# EAGLE board rocketpanda_v1 (EAGLE 9.0.1)
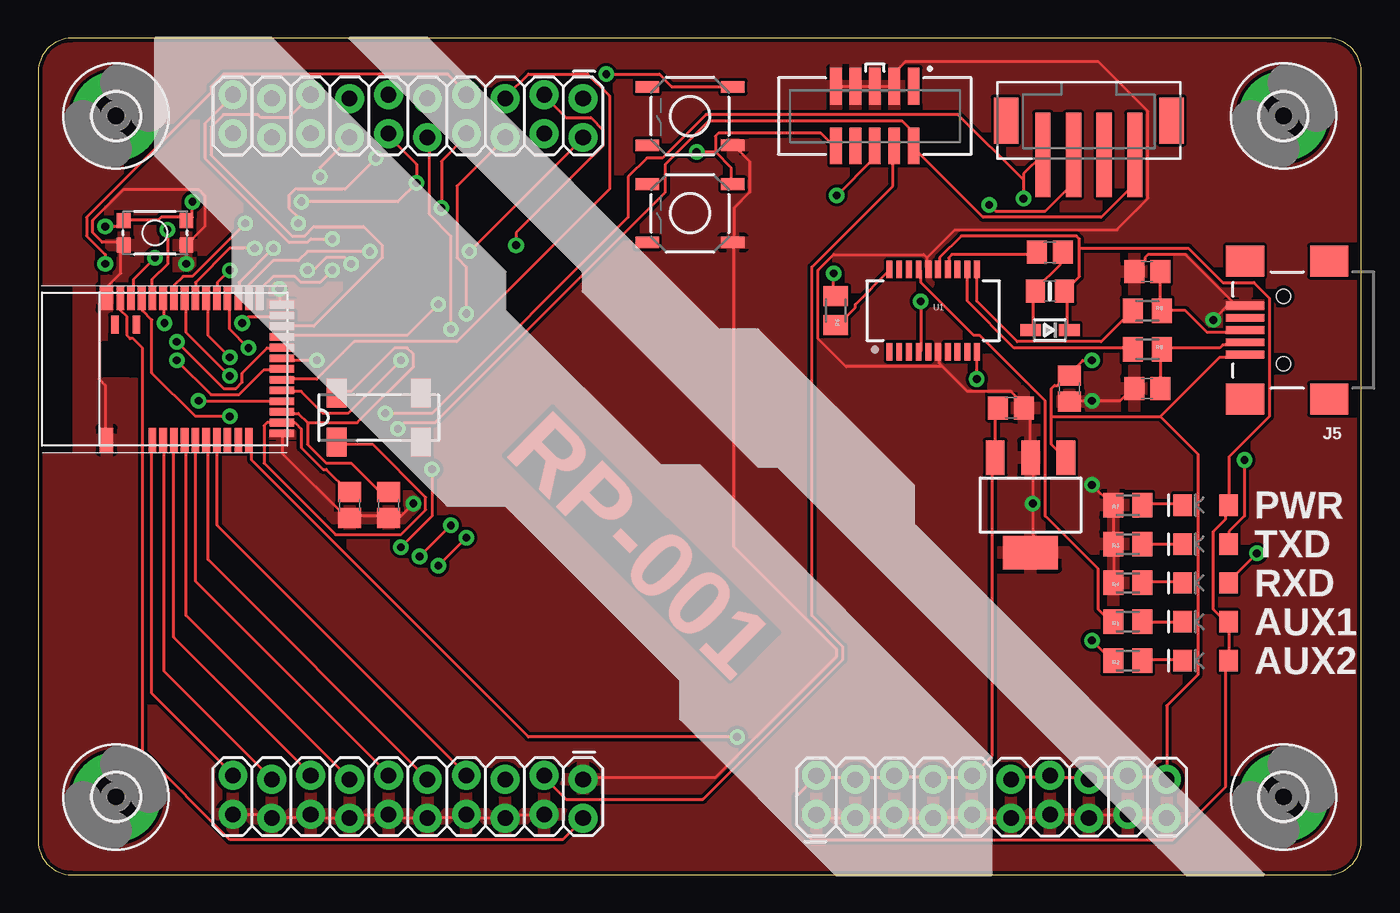
[diagram p0: board, top side]
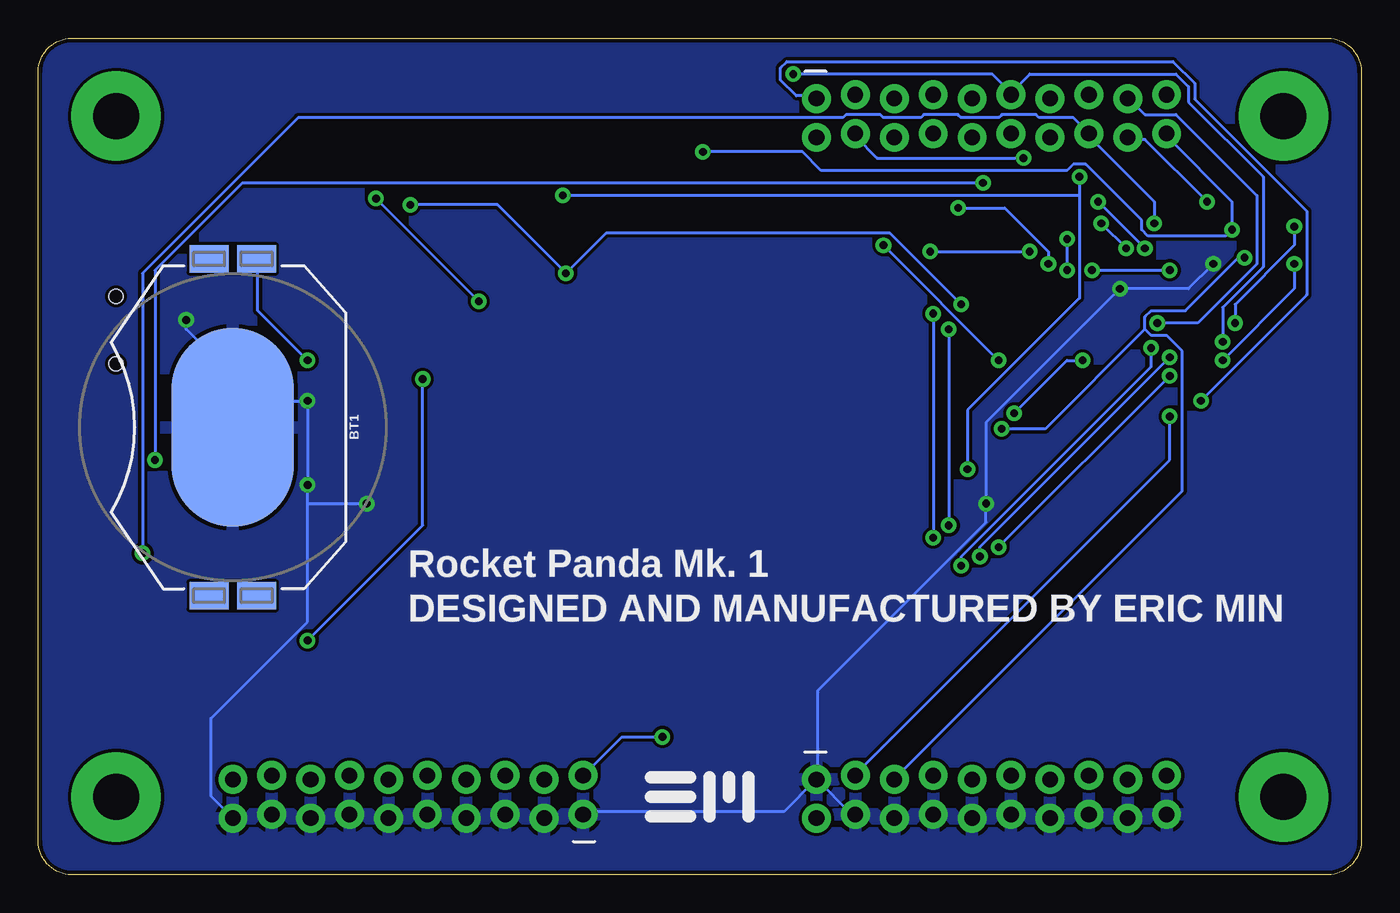
[diagram p1: board, bottom side, seen from below]

Size 86.36 x 54.61 mm. Coordinates in mm from the lower left corner, seen from the top.
Outline: 0,52.44 0,2.17 arc90 2.17,0 84.19,0 arc90 86.36,2.17 86.36,52.44 arc90 84.19,54.61 2.17,54.61 arc90 0,52.44
Copper layers (1*16): Top 0.035mm / dielectric 1.5mm / Bottom 0.035mm
Design rules "SparkFun": minimum track width 8mil, minimum drill 20mil, track to track 8mil, track to pad 8mil, pad to pad 8mil, via to via 8mil, smd to smd 8mil, copper to edge 10mil, drill to drill 8mil, minimum pad ring 12mil, minimum via ring 10mil, stop-mask expansion 4mil, vias tented up to drill 25mil, thermal gap 10mil
tKeepout: area 0,8.9 to 3.2,45.7
bKeepout: area 0,8.9 to 3.2,45.7

## Footprints (pad centres in the part's own frame; a part is rotated, then mirrored left to right if it is on the bottom)
BATTCON_20MM_4LEGS_OVERPASTE_INNER = smd 1.778 x 2.54: 1 -11,1.55; 3 11,1.55; P$1 -11,-1.55; P$2 11,-1.55 | smd 13 x 8: 2 0,0
C0805 = smd 1.3 x 1.5: 1 -0.85,0; 2 0.85,0
SOD-323 = smd 1.35 x 0.8: A 1.27,0; C -1.27,0
LED-1206@1 = smd 1.2 x 1.4: A -1.5,0; C 1.5,0
3,0-PAD = drill 3 pad 5.842: B3,0 0,0
SOT223 = smd 1.219 x 2.235: 1 -2.311,-3.099; 2 0,-3.099; 3 2.311,-3.099 | smd 3.6 x 2.2: 4 0,3.099
2X10_LOCK = drill 1.016 pad 1.88: 1 0,0.127; 2 0,2.667; 3 2.54,-0.127; 4 2.54,2.413; 5 5.08,0.127; 6 5.08,2.667; 7 7.62,-0.127; 8 7.62,2.413; 9 10.16,0.127; 10 10.16,2.667; 11 12.7,-0.127; 12 12.7,2.413; 13 15.24,0.127; 14 15.24,2.667; 15 17.78,-0.127; 16 17.78,2.413; 17 20.32,0.127; 18 20.32,2.667; 19 22.86,-0.127; 20 22.86,2.413
2X5-SMD-1.27MM = smd 0.76 x 2.4: 1 2.54,1.95; 2 2.54,-1.95; 3 1.27,1.95; 4 1.27,-1.95; 5 0,1.95; 6 0,-1.95; 7 -1.27,1.95; 8 -1.27,-1.95; 9 -2.54,1.95; 10 -2.54,-1.95
USB-MINIB = smd 2.5 x 0.5: D+ 2.5,0; D- 2.5,0.8; GND 2.5,-1.6; ID 2.5,-0.8; VBUS 2.5,1.6 | smd 2.5 x 2: S1 -3,4.5; S2 2.5,4.5; S3 -3,-4.5; S4 2.5,-4.5 | hole 0.9: 0,2.2; 0,-2.2
MC-306 = smd 1.3 x 1.9: 1 -2.75,-1.6; 2 2.75,-1.6; 3 2.75,1.6; 4 -2.75,1.6
M0805 = smd 1.3 x 1.6: 1 -0.95,0; 2 0.95,0
0805-NO = smd 1.24 x 1.5: 1 -0.95,0; 2 0.95,0
TACTILE_SWITCH_SMD_5.2MM = smd 1.524 x 0.762: 1 -2.794,1.905; 2 2.794,1.905; 3 -2.794,-1.905; 4 2.794,-1.905
TACTILE_SWITCH_SMD_4.6X2.8MM = smd 0.9 x 1: 1 -2.05,-0.8; 2 2.05,-0.8; 3 2.05,0.8; 4 -2.05,0.8
SSOP20_L = smd 0.381 x 1.143: 1 -2.857,-2.68; 2 -2.223,-2.68; 3 -1.587,-2.68; 4 -0.953,-2.68; 5 -0.318,-2.68; 6 0.318,-2.68; 7 0.953,-2.68; 8 1.587,-2.68; 9 2.223,-2.68; 10 2.857,-2.68; 11 2.857,2.68; 12 2.223,2.68; 13 1.587,2.68; 14 0.953,2.68; 15 0.318,2.68; 16 -0.318,2.68; 17 -0.953,2.68; 18 -1.587,2.68; 19 -2.223,2.68; 20 -2.857,2.68
MDBT40 = smd 1.6 x 0.9: P1 -4.65,3.8; P39 4.65,3.8 | smd 1.6 x 0.5: P2 -4.65,0.8; P3 -4.65,0.1; P4 -4.65,-0.6; P5 -4.65,-1.3; P6 -4.65,-2; P7 -4.65,-2.7; P8 -4.65,-3.4; P9 -4.65,-4.1; P10 -4.65,-4.8; P11 -4.65,-5.5; P25 4.65,-6.2; P26 4.65,-5.5; P27 4.65,-4.8; P28 4.65,-4.1; P29 4.65,-3.4; P30 4.65,-2.7; P31 4.65,-2; P32 4.65,-1.3; P33 4.65,-0.6; P34 4.65,0.1; P35 4.65,0.8; P36 4.65,1.5; P37 4.65,2.2; P38 4.65,2.9 | smd 0.5 x 1.6: P12 -4.2,-7.65; P13 -3.5,-7.65; P14 -2.8,-7.65; P15 -2.1,-7.65; P16 -1.4,-7.65; P17 -0.7,-7.65; P18 0,-7.65; P19 0.7,-7.65; P20 1.4,-7.65; P21 2.1,-7.65; P22 2.8,-7.65; P23 3.5,-7.65; P24 4.2,-7.65 | smd 1.2 x 0.5: P40 2.9,3.25; P41 2.9,1.85
B4B-PH-SM4-TB = smd 1 x 5.5: 1 3,0; 2 1,0; 3 -1,0; 4 -3,0 | smd 1.6 x 3: M1 5.4,-2.25; M2 -5.4,-2.25

## Placement (x,y rotation side)
BT1  [BATTCON_20MM_4LEGS_OVERPASTE_INNER]  73.66,29.21 270 bottom
C1  [C0805]  20.32,24.13 90 top
C2  [C0805]  22.86,24.13 90 top
C3  [C0805]  72.39,31.75 180 top
C4  [C0805]  72.39,39.37 180 top
C5  [C0805]  67.31,31.75 270 top
C6  [C0805]  63.5,30.48 0 top
C7  [C0805]  66.04,40.64 0 top
D1  1N4148  [SOD-323]  66.04,35.56 180 top
D3  GREEN  [LED-1206@1]  76.2,21.59 180 top
D4  GREEN  [LED-1206@1]  76.2,19.05 180 top
D7  GREEN  [LED-1206@1]  76.2,24.13 180 top
H1  MOUNT-PAD-ROUND3.0  [3,0-PAD]  5.08,49.53 0 top
H2  MOUNT-PAD-ROUND3.0  [3,0-PAD]  81.28,49.53 0 top
H3  MOUNT-PAD-ROUND3.0  [3,0-PAD]  5.08,5.08 0 top
H4  MOUNT-PAD-ROUND3.0  [3,0-PAD]  81.28,5.08 0 top
IC4  [SOT223]  64.77,24.13 180 top
J1  [2X10_LOCK]  35.56,50.8 180 top
J2  JTAG  [2X5-SMD-1.27MM]  54.61,49.53 0 top
J3  [2X10_LOCK]  35.56,6.35 180 top
J5  [USB-MINIB]  81.28,35.56 180 top
J7  [2X10_LOCK]  50.8,3.81 0 top
Q1  MC-306  [MC-306]  22.22,29.84 0 top
R1  [M0805]  71.12,16.51 0 top
R2  [M0805]  71.12,13.97 0 top
R3  [M0805]  71.12,21.59 0 top
R4  [M0805]  71.12,19.05 0 top
R5  10K  [0805-NO]  66.04,38.1 0 top
R6  [M0805]  52.07,36.83 90 top
R7  [M0805]  71.12,24.13 0 top
R8  [M0805]  72.39,34.29 180 top
R9  [M0805]  72.39,36.83 180 top
RXLED  GREEN  [LED-1206@1]  76.2,16.51 180 top
S1  [TACTILE_SWITCH_SMD_5.2MM]  42.55,49.53 180 top
S2  [TACTILE_SWITCH_SMD_5.2MM]  42.55,43.18 180 top
S3  [TACTILE_SWITCH_SMD_4.6X2.8MM]  7.62,41.91 0 top
TXLED  GREEN  [LED-1206@1]  76.2,13.97 180 top
U1  FTS31XS-U  [SSOP20_L]  58.42,36.83 0 top
U$1  MDBT42Q  [MDBT40]  8.25,33.02 90 top
X1  [B4B-PH-SM4-TB]  68.58,46.99 180 top

## Library data of the parts
BT1 = SparkFun-Batteries
C1-C7 R1-R4 R6-R9 = adafruit
D1 R5 = microbuilder
D3 D4 D7 RXLED TXLED = SparkFun-LED; PROD_ID: DIO-09910
H1-H4 = holes
IC4 = linear-technology; MPN: LT1129CST-5#PBF; OC_FARNELL: 1663375; OC_NEWARK: 57M2069
J1 J3 J7 = SparkFun-Connectors
J2 = SparkFun-Connectors; PROD_ID: CONN-14503
J5 = SparkFun-Connectors; PROD_ID: CONN-08193; SF_ID: PRT-00587
Q1 = crystal; MPN: MC-306 60.0KHZ 100PPM ,12.5PF; OC_FARNELL: 1278040; OC_NEWARK: 31M5576
S1 S2 = SparkFun-Switches; PROD_ID: SWCH-08247; SF_SKU: COM-08720
S3 = SparkFun-Switches; PROD_ID: SWCH-13065
U1 = SparkFun-DigitalIC; PROD_ID: IC-11524
U$1 = mdbt42
X1 = con-JST PH

## Nets
3.3V: C6.1 D1.C D7.A IC4.3 J7.2 J7.4 J7.6 J7.8 J7.10 R5.2 RXLED.A TXLED.A U1.15 U$1.P11
3V3: J2.1
D+: C4.1 J5.D+ R9.1
D-: C3.1 J5.D- R8.1
DFU: J1.18 S3.3 S3.4 U$1.P34
DTR: C7.1 U1.14
FRST: J3.2 U$1.P38
GND: BT1.2 C1.1 C2.1 C3.2 C4.2 C5.2 C6.2 IC4.2 IC4.4 J2.3 J2.5 J2.7 J2.9 J3.1 J3.4 J3.6 J3.8 J3.10 J3.12 J3.14 J3.16 J3.18 J3.20 J5.GND J7.1 J7.3 J7.5 J7.7 J7.9 J7.11 J7.13 J7.15 J7.17 J7.19 R3.1 R4.1 R7.1 S1.1 S2.1 S3.1 S3.2 U1.6 U1.16 U$1.P1 U$1.P12 U$1.P24 U$1.P39
N$1: D3.C R3.2
N$2: D4.C R4.2
N$3: C2.2 Q1.4 U$1.P14
N$4: C1.2 Q1.1 U$1.P13
N$5: D7.C R7.2
N$6: R6.1 U1.20
N$40: R1.2 RXLED.C
N$41: R2.2 TXLED.C
N$42: R1.1 U1.17
N$50: R2.1 U1.10
N$51: R8.2 U1.12
N$52: R9.2 U1.11
NRST: J1.20 J2.10 S2.3 U$1.P35
P002: J1.1 U$1.P15
P003: J1.3 U$1.P16
P004: J1.5 U$1.P17
P005: J1.7 U$1.P18
P006: J1.9
P007: J1.11 S1.3 U$1.P20
P008: J1.13
P009: J1.15 U$1.P22
P010: J1.17 U$1.P23
P011: J1.19 U$1.P25
P012: J1.2 U$1.P26
P013: J1.4 U$1.P27
P014: J1.6 U$1.P28
P015: J1.8 U$1.P29
P016: J1.10 U$1.P30
P017: D3.A J1.12 U$1.P31
P018: J1.14 J2.6 U$1.P32
P019: D4.A J1.16 U$1.P33
P025: J3.19 U$1.P2
P026: J3.17 U$1.P3
P027: J3.15 U$1.P4
P028: J3.13 U$1.P5
P029: J3.11 U$1.P6
P030: J3.9 U$1.P7
P031: J3.7 U$1.P8
RESET: C7.2 D1.A R5.1
RX: R6.2 U$1.P21 X1.2
SWCLK: J2.4 J3.3 U$1.P36
SWDCLK: X1.3
SWDIO: J2.2 J3.5 U$1.P37 X1.4
TX: U1.4 U$1.P19 X1.1
VIN: BT1.1 C5.1 IC4.1 J5.VBUS J7.12 J7.14 J7.16 J7.18 J7.20

## Tracks (layer width: path | path; a pad name or v marks a point on that pad's centre or on a via)
3.3V  (via drill 0.51)
  Top 0.203: 67.97,40.89 67.97,39.07 67.16,38.25 R5.2 67.16,38.05 67.16,35.61 D1.C | 67.97,40.89 67.97,41.5 67.77,41.71 60.25,41.71 58.83,40.28 58.83,39.68 U1.15 | 67.97,40.89 75.08,40.89 77.32,38.66 79.35,38.66 80.37,37.64 80.37,29.92 77.72,27.28 77.72,24.23 D7.A 77.52,24.03 77.52,23.22 76.71,22.4 76.71,17.32 77.52,16.51 RXLED.A 77.72,16.51 77.72,14.07 TXLED.A 77.52,13.87 77.52,5.74 74.07,2.29 50.49,2.29 49.48,3.3 49.48,5.13 50.7,6.35 J7.2 50.9,6.35 53.34,6.35 | C6.1 62.48,30.33 62.48,27.28 IC4.3 62.28,27.08 62.28,7.77 61.06,6.55 J7.10 60.86,6.35 58.42,6.35 | 58.42,6.35 55.98,6.35 J7.6 55.78,6.35 53.34,6.35 | v45.62,8.99 32,8.99 13.92,27.08 13.92,28.3 U$1.P11 | 53.34,6.35 J7.4 | 58.42,6.35 J7.8
  Bottom 0.203: v45.62,8.99 48.26,8.99 50.7,6.55 J7.2
D+
  Top 0.203: C4.1 73.25,39.27 73.25,36.83 R9.1 74.88,36.83 76.3,35.41 78.74,35.41 J5.D+
D-
  Top 0.203: C3.1 73.25,31.75 73.25,34.19 R8.1 73.46,34.39 77.11,34.39 77.32,34.6 78.74,34.6 J5.D-
DFU  (via drill 0.51)
  Top 0.203: v8.23,36.02 8.23,37.64 U$1.P34 | v4.37,42.32 5.18,42.32 5.38,42.52 S3.4 5.59,42.72 7.82,42.72 8.03,42.93 9.45,42.93 9.65,42.72 S3.3 9.86,42.72 10.06,42.93 v10.06,43.94
  Bottom 0.203: v8.23,36.02 8.23,37.24 4.37,41.1 v4.37,42.32 | v10.06,43.94 14.12,48.01 15.14,48.01 J1.18
DTR
  Top 0.203: U1.14 59.44,39.68 59.44,40.28 59.64,40.49 65.13,40.49 C7.1
FRST
  Top 0.203: U$1.P38 5.38,37.64 5.38,36.83 5.79,36.42 5.79,35.2 5.99,35 6.2,35 6.81,34.39 6.81,7.98 12.5,2.29 34.24,2.29 35.46,3.5 J3.2
GND  (via drill 0.51)
  Top 0.203: 53.34,51.46 52.12,51.46 J2.9 | 53.34,51.46 54.56,51.46 J2.5 54.76,51.46 55.78,51.46 J2.3 55.98,51.66 55.98,52.48 56.59,53.09 69.19,53.09 72.44,49.84 72.44,44.15 70.41,42.11 59.84,42.11 58.01,40.28 | 53.34,51.46 J2.7 | 59.03,33.17 60.66,31.55 63.5,31.55 64.52,30.53 C6.2 64.52,30.33 64.72,30.12 64.72,27.28 IC4.2 64.92,27.08 v64.92,24.23 64.92,21.18 IC4.4 | 59.03,33.17 58.83,33.38 58.83,33.99 U1.6 | 58.01,40.28 58.01,39.68 U1.16 | 58.01,40.28 57.81,40.49 51.92,40.49 50.9,39.47 50.9,35 52.73,33.17 59.03,33.17 | 22.86,23.42 20.42,23.42 C1.1 20.22,23.22 15.95,27.48 15.95,28.7 U$1.P12 | U$1.P1 4.37,28.5 4.37,31.95 3.96,32.36 3.96,37.24 4.37,37.64 U$1.P39 4.57,37.85 4.57,38.46 5.38,39.27 5.38,41.1 S3.1 5.38,41.3 4.17,41.3 3.56,41.91 3.56,42.72 5.59,44.76 10.46,44.76 10.87,44.35 10.87,42.32 9.86,41.3 S3.2 9.65,41.1 v9.65,39.88 | v15.75,38.25 15.75,37.24 U$1.P24 | 22.86,23.42 23.67,23.42 v24.49,24.23 | 22.86,23.42 C2.1 | 77.93,37.44 78.13,37.24 78.74,37.24 J5.GND | 77.93,37.44 74.88,40.49 72.44,40.49 72.24,40.28 72.24,40.08 71.63,39.47 C4.2 | 70.21,21.59 70.21,19.15 R4.1 | 70.21,21.59 70.21,24.03 R7.1 70,24.23 v68.78,25.45 | 70.21,21.59 R3.1 | C5.2 67.36,30.94 v68.78,30.94 70.61,30.94 71.43,31.75 C3.2 | v76.71,36.22 77.93,37.44 | 53.34,3.71 51.1,3.71 50.9,3.91 J7.1 | 58.42,3.71 56.19,3.71 55.98,3.91 J7.5 55.78,3.91 55.57,3.71 53.34,3.71 | 53.34,3.71 J7.3 | 63.5,3.71 61.27,3.71 61.06,3.91 J7.9 60.86,3.91 60.66,3.71 58.42,3.71 | 68.38,3.91 66.14,3.91 J7.13 65.94,3.91 65.73,3.71 63.5,3.71 | 68.38,3.91 68.58,3.71 J7.15 68.38,3.91 | 68.38,3.91 71.02,3.91 J7.17 71.22,3.91 71.43,3.71 73.66,3.71 J7.19
  Top 0.203: 63.5,3.71 J7.11 | 58.42,3.71 J7.7 | 27.74,3.71 25.5,3.71 J3.10 25.3,3.71 23.06,3.71 22.86,3.91 | 27.74,3.71 27.94,3.91 J3.8 27.74,3.71 | 27.74,3.71 30.38,3.71 J3.6 30.58,3.71 30.79,3.91 33.02,3.91 J3.4 | 17.58,3.71 15.34,3.71 J3.18 15.14,3.71 14.93,3.91 12.7,3.91 J3.20 | 17.58,3.71 17.78,3.91 J3.16 17.58,3.71 | 17.58,3.71 20.22,3.71 J3.14 20.42,3.71 20.62,3.91 22.86,3.91 | 22.86,3.91 J3.12 | S1.1 45.41,47.6 46.43,46.58 46.43,44.55 45.41,43.54 45.41,41.3 S2.1 45.41,41.1 45.41,21.39 52.12,14.68 52.12,14.28 44.2,6.35 35.66,6.35 J3.1
  Bottom 0.203: v9.65,39.88 11.28,38.25 v15.75,38.25 24.49,29.52 v24.49,24.23 24.49,23.01 35.46,12.04 35.46,6.35 J3.1 | 72.03,30.94 v68.78,30.94 v68.78,25.45 68.78,24.23 | 72.03,30.94 73.66,29.31 BT1.2 72.03,30.94 | v76.71,36.22 76.71,35.61 72.03,30.94 | J3.4 33.02,4.12 33.43,4.12 35.46,6.15 J3.1 | J7.1 50.7,4.12 37.69,4.12 35.66,6.15 J3.1 | 68.78,24.23 68.78,16.51 75.08,10.21 75.08,5.13 73.66,3.71 J7.19 | 68.78,24.23 v64.92,24.23
  pour Top: -5.08,62.23 92.71,62.23 92.71,-7.62 -5.08,-7.62
  pour Bottom: -2.54,58.42 88.9,58.42 88.9,-3.81 -2.54,-3.81
N$1
  Top 0.203: R3.2 D3.C
N$2
  Top 0.203: D4.C 74.68,19.15 72.24,19.15 R4.2
N$3
  Top 0.203: 17.58,29.52 17.58,28.09 18.8,26.87 20.42,26.87 22.25,25.04 22.86,25.04 C2.2 | 17.58,29.52 16.97,30.12 15.95,30.12 U$1.P14 | 17.58,29.52 20.83,29.52 24.49,33.17 24.49,33.99 24.08,34.39 23.27,34.39 20.42,31.55 19.61,31.55 Q1.4
N$4
  Top 0.203: C1.2 20.22,25.04 18.8,26.47 18.59,26.47 17.17,27.89 17.17,29.11 16.76,29.52 15.95,29.52 U$1.P13 15.75,29.52 14.93,29.52 14.73,29.31 14.73,26.87 19.41,22.2 23.67,22.2 25.3,23.82 25.3,24.64 21.84,28.09 19.61,28.09 Q1.1
N$5
  Top 0.203: D7.C 74.68,24.23 72.24,24.23 R7.2
N$6
  Top 0.203: U1.20 55.57,39.47 53.34,37.24 53.34,37.03 52.12,35.81 R6.1
N$40
  Top 0.203: R1.2 RXLED.C
N$41
  Top 0.203: TXLED.C 74.68,14.07 72.24,14.07 R2.2
N$42
  Top 0.203: U1.17 57.61,39.47 57.61,38.66 61.06,35.2 61.47,35.2 65.73,30.94 65.73,23.42 69.19,19.96 69.19,17.32 70,16.51 R1.1
N$50  (via drill 0.51)
  Top 0.203: v61.27,32.36 61.27,33.99 U1.10 | v68.78,15.29 70,14.07 R2.1
  Bottom 0.203: v61.27,32.36 61.27,22.81 v68.78,15.29
N$51
  Top 0.203: U1.12 60.66,39.47 60.66,37.44 63.7,34.39 71.43,34.39 R8.2
N$52
  Top 0.203: U1.11 61.27,39.47 61.27,37.44 63.91,34.8 69.39,34.8 71.43,36.83 R9.2
NRST  (via drill 0.51)
  Top 0.203: 44.2,47.19 45.21,46.18 45.21,45.16 S2.3 | 44.2,47.19 44.2,48.21 44.4,48.41 51.1,48.41 51.92,47.6 J2.10 | v8.43,42.11 8.43,39.88 7.42,38.86 7.42,37.85 U$1.P35 | v42.98,47.19 44.2,47.19
  Bottom 0.203: J1.20 12.7,48.21 8.43,43.94 v8.43,42.11 8.84,41.71 13.92,41.71 14.33,42.11 14.33,42.72 17.98,46.38 18.8,46.38 19.2,45.97 35.26,45.97 36.47,47.19 v42.98,47.19
P002  (via drill 0.51)
  Top 0.203: v10.46,30.94 15.75,30.94 U$1.P15
  Bottom 0.203: v10.46,30.94 3.56,37.85 3.56,43.33 10.87,50.65 10.87,51.66 12.29,53.09 37.49,53.09 37.9,52.68 37.9,51.87 36.88,50.85 35.66,50.85 J1.1
P003  (via drill 0.51)
  Top 0.203: v23.67,33.58 20.22,30.12 18.59,30.12 17.17,31.55 15.95,31.55 U$1.P16 | v31.19,41.1 31.19,41.91 36.88,47.6 36.88,48.62 36.07,49.43 34.44,49.43 33.02,50.85 J1.3
  Bottom 0.203: v31.19,41.1 v23.67,33.58
P004
  Top 0.203: U$1.P17 15.95,32.36 18.19,32.36 20.62,34.8 27.33,34.8 37.29,44.76 37.29,50.85 35.87,52.27 32,52.27 30.58,50.85 J1.5
P005  (via drill 0.51)
  Top 0.203: v9.04,33.58 11.28,31.34 13.11,31.34 14.73,32.97 15.75,32.97 U$1.P18 | v4.37,39.88 4.37,40.49 3.15,41.71 3.15,42.93 11.28,51.05 11.28,51.46 12.09,52.27 26.72,52.27 27.94,51.05 J1.7
  Bottom 0.203: v9.04,33.58 4.37,38.25 v4.37,39.88
P007  (via drill 0.51)
  Top 0.203: v37.08,52.27 40.54,52.27 41.35,51.46 45.21,51.46 S1.3 | v9.04,34.8 12.09,31.75 12.9,31.75 13.31,32.16 13.31,32.77 14.93,34.39 15.75,34.39 U$1.P20
  Bottom 0.203: v37.08,52.27 24.08,52.27 22.86,51.05 | v9.04,34.8 9.04,37.03 6.4,39.68 6.4,45.57 11.28,50.44 11.28,51.46 12.09,52.27 21.64,52.27 22.86,51.05 | 22.86,51.05 J1.11
P009
  Top 0.203: U$1.P22 15.95,35.81 17.98,35.81 22.45,40.28 22.45,41.1 21.23,42.32 17.98,42.32 17.37,41.71 16.56,41.71 11.28,46.99 11.28,48.82 12.09,49.63 14.33,49.63 14.53,49.43 16.36,49.43 17.78,50.85 J1.15
P010  (via drill 0.51)
  Top 0.203: v13.31,36.02 13.72,36.42 15.75,36.42 U$1.P23
  Bottom 0.203: v13.31,36.02 10.67,36.02 6.81,39.88 6.81,44.35 12.09,49.63 14.12,49.63 15.14,50.65 J1.17
P011  (via drill 0.51)
  Top 0.203: v19.2,39.47 18.39,38.66 17.17,38.66 16.76,39.07 15.34,39.07 14.53,38.25 14.53,37.85 U$1.P25 | v19.2,41.5 17.78,41.5 17.58,41.3 16.36,41.3 10.87,46.79 10.87,49.02 12.7,50.85 J1.19
  Bottom 0.203: v19.2,41.5 v19.2,39.47
P012  (via drill 0.51)
  Top 0.203: v21.64,40.69 17.58,40.69 16.97,40.08 15.34,40.08 13.72,38.46 13.72,37.85 U$1.P26 | v28.14,40.69 35.46,48.01 J1.2
  Bottom 0.203: v28.14,40.69 v21.64,40.69
P013  (via drill 0.51)
  Top 0.203: v15.34,40.89 13.11,38.66 13.11,37.85 U$1.P27 | v16.97,42.52 16.97,42.93 16.36,43.54 16.36,44.35 16.76,44.76 20.02,44.76 v22.05,46.79
  Bottom 0.203: v16.97,42.52 v15.34,40.89 | v22.05,46.79 31.6,46.79 33.02,48.21 J1.4
P014  (via drill 0.51)
  Top 0.203: v13.72,34.39 12.5,35.61 12.5,37.64 U$1.P28 | v27.94,22 v26.11,20.17 | v27.94,36.63 27.94,39.68 27.33,40.28 27.33,44.96 30.38,48.01 J1.6
  Bottom 0.203: v13.72,34.39 13.72,33.17 26.11,20.78 v26.11,20.17 | v27.94,36.63 v27.94,22
P015  (via drill 0.51)
  Top 0.203: v12.5,39.47 11.68,38.66 11.68,37.85 U$1.P29 | v17.58,39.47 17.98,39.47 18.8,40.28 20.02,40.28 v20.42,39.88 | v26.31,43.54 26.31,46.58 27.94,48.21 J1.8
  Bottom 0.203: v17.58,39.47 v12.5,39.47 | v20.42,39.88 20.42,40.69 23.27,43.54 v26.31,43.54
P016  (via drill 0.51)
  Top 0.203: v12.5,33.78 11.07,35.2 11.07,37.64 U$1.P30 | v26.92,22.81 v24.89,20.78 | v26.92,35.61 26.92,41.71 25.5,43.13 25.5,48.01 J1.10
  Bottom 0.203: v12.5,33.78 24.89,21.39 v24.89,20.78 | v26.92,35.61 v26.92,22.81
P017  (via drill 0.51)
  Top 0.203: v78.74,27.08 78.74,23.42 77.72,22.4 77.72,21.59 D3.A | J1.12 22.86,48.21 24.69,46.38 v24.69,45.16 23.47,43.94 v17.17,43.94 | v14.12,40.89 12.5,40.89 10.26,38.66 10.26,37.85 U$1.P31
  Bottom 0.203: v78.74,27.08 78.74,39.47 73.05,45.16 v24.69,45.16 | v17.17,43.94 v14.12,40.89
P018  (via drill 0.51)
  Top 0.203: v12.5,32.56 9.65,35.41 9.65,37.64 U$1.P32 | v23.67,21.39 25.7,23.42 v25.7,26.47 | v18.39,45.57 18.39,46.18 20.22,48.01 J1.14 | v52.12,44.35 54.56,46.79 54.56,47.4 J2.6
  Bottom 0.203: v23.67,21.39 v12.5,32.56 | v25.7,26.47 25.7,30.33 18.39,37.64 18.39,44.35 | v18.39,45.57 18.39,44.35 | 18.39,44.35 v52.12,44.35
P019  (via drill 0.51)
  Top 0.203: v79.55,20.98 77.72,19.15 D4.A | v13.51,42.52 10.06,39.07 9.45,39.07 8.84,38.46 8.84,37.85 U$1.P33
  Bottom 0.203: v79.55,20.98 79.55,39.27 69.39,49.43 33.83,49.43 33.63,49.63 31.39,49.63 31.19,49.43 28.75,49.43 28.55,49.63 26.31,49.63 26.11,49.43 23.67,49.43 23.47,49.63 21.23,49.63 21.03,49.43 18.8,49.43 17.78,48.41 J1.16 17.78,48.21 13.51,43.94 v13.51,42.52
P025
  Top 0.203: U$1.P2 7.42,28.3 7.42,11.84 12.7,6.55 J3.19
P026
  Top 0.203: U$1.P3 8.23,28.3 8.23,13.26 15.14,6.35 J3.17
P027
  Top 0.203: U$1.P4 8.84,28.3 8.84,15.49 17.78,6.55 J3.15
P028
  Top 0.203: U$1.P5 9.65,28.3 9.65,16.92 20.22,6.35 J3.13
P029
  Top 0.203: U$1.P6 10.26,28.3 10.26,19.15 22.86,6.55 J3.11
P030
  Top 0.203: U$1.P7 11.07,28.3 11.07,20.57 25.3,6.35 J3.9
P031
  Top 0.203: U$1.P8 11.68,28.3 11.68,22.81 27.94,6.55 J3.7
RESET
  Top 0.203: D1.A 64.92,35.61 64.92,38.05 R5.1 65.13,38.25 66.75,39.88 66.75,40.49 C7.2
RX  (via drill 0.51)
  Top 0.203: v26.11,37.24 24.08,35.2 15.95,35.2 U$1.P21 | v51.92,39.27 51.92,37.85 R6.2 | v62.08,43.74 62.48,43.33 65.73,43.33 67.56,45.16 67.56,46.99 X1.2
  Bottom 0.203: v26.11,37.24 30.79,41.91 49.28,41.91 v51.92,39.27 56.39,43.74 v62.08,43.74
SWCLK  (via drill 0.51)
  Top 0.203: v12.5,29.92 10.26,29.92 7.42,32.77 7.42,36.22 6.81,36.83 6.81,37.64 U$1.P36 | J2.4 55.78,47.4 55.78,44.96 50.49,39.68 50.49,16.92 52.53,14.88 52.53,14.07 43.38,4.93 34.44,4.93 33.02,6.35 J3.3
  Bottom 0.203: v12.5,29.92 12.5,27.08 33.02,6.55 J3.3
SWDIO  (via drill 0.51)
  Top 0.203: X1.4 71.43,46.99 71.43,44.96 69.39,42.93 61.67,42.93 57.2,47.4 J2.2 57,47.6 57,48.62 56.39,49.23 43.79,49.23 40.95,46.38 40.95,44.55 25.91,29.52 23.88,29.52 v23.47,29.11 | v7.62,40.28 6.2,38.86 6.2,37.85 U$1.P37
  Bottom 0.203: v7.62,40.28 8.03,40.28 11.48,36.83 13.72,36.83 14.12,36.42 14.12,35.61 | 14.12,35.61 13.72,35.2 12.7,35.2 11.68,34.19 11.68,25.04 30.38,6.35 J3.5 | v23.47,29.11 20.62,29.11 14.12,35.61
TX  (via drill 0.51)
  Top 0.203: v57.61,37.44 57.61,34.19 U1.4 | 64.31,45.36 64.31,45.77 65.53,46.99 X1.1 | 64.31,45.36 v64.31,44.15 | v18.19,33.58 15.95,33.58 U$1.P19 | v22.66,30.12 25.7,30.12 38.51,42.93 38.51,45.57 39.73,46.79 40.74,46.79 43.59,49.63 60.05,49.63 64.31,45.36
  Bottom 0.203: v64.31,44.15 v57.61,37.44 | v18.19,33.58 19.2,33.58 v22.66,30.12
VIN  (via drill 0.51)
  Top 0.203: 73.66,6.35 71.22,6.35 J7.18 71.02,6.35 68.58,6.35 | J7.12 63.5,6.35 65.94,6.35 J7.14 66.14,6.35 68.58,6.35 | 68.58,6.35 J7.16 | 66.14,29.92 66.14,28.09 66.95,27.28 IC4.1 | 66.14,29.92 66.14,31.75 66.34,31.95 66.55,31.95 67.16,32.56 C5.1 67.36,32.77 68.17,33.58 v68.78,33.58 | 73.25,29.92 77.11,33.78 78.74,33.78 J5.VBUS | 66.14,29.92 73.25,29.92 | 73.66,6.35 73.66,11.02 75.69,13.06 75.69,27.48 73.25,29.92 | 73.66,6.35 J7.20
  Bottom 0.203: v68.78,33.58 72.03,36.83 72.03,40.08 BT1.1

## Text on the board
Top: RP-001
tPlace: PWR | TXD | RXD | AUX1 | AUX2
bPlace: Rocket Panda Mk. 1 | DESIGNED AND MANUFACTURED BY ERIC MIN
tStop: RP-001